# Altium PCB CSI2-WAND_Rev01.PcbDoc
Units mm, origin at the board's own origin, x right, y up, seen from the top; angles counter-clockwise.
Board outline 40.5 x 52 mm, 4 copper layers (Layer1 Top, Layer2, Layer3, Layer4 Bottom), stack 0.95 mm thick; 31 components, 28 nets, 124 pads, 39 vias.
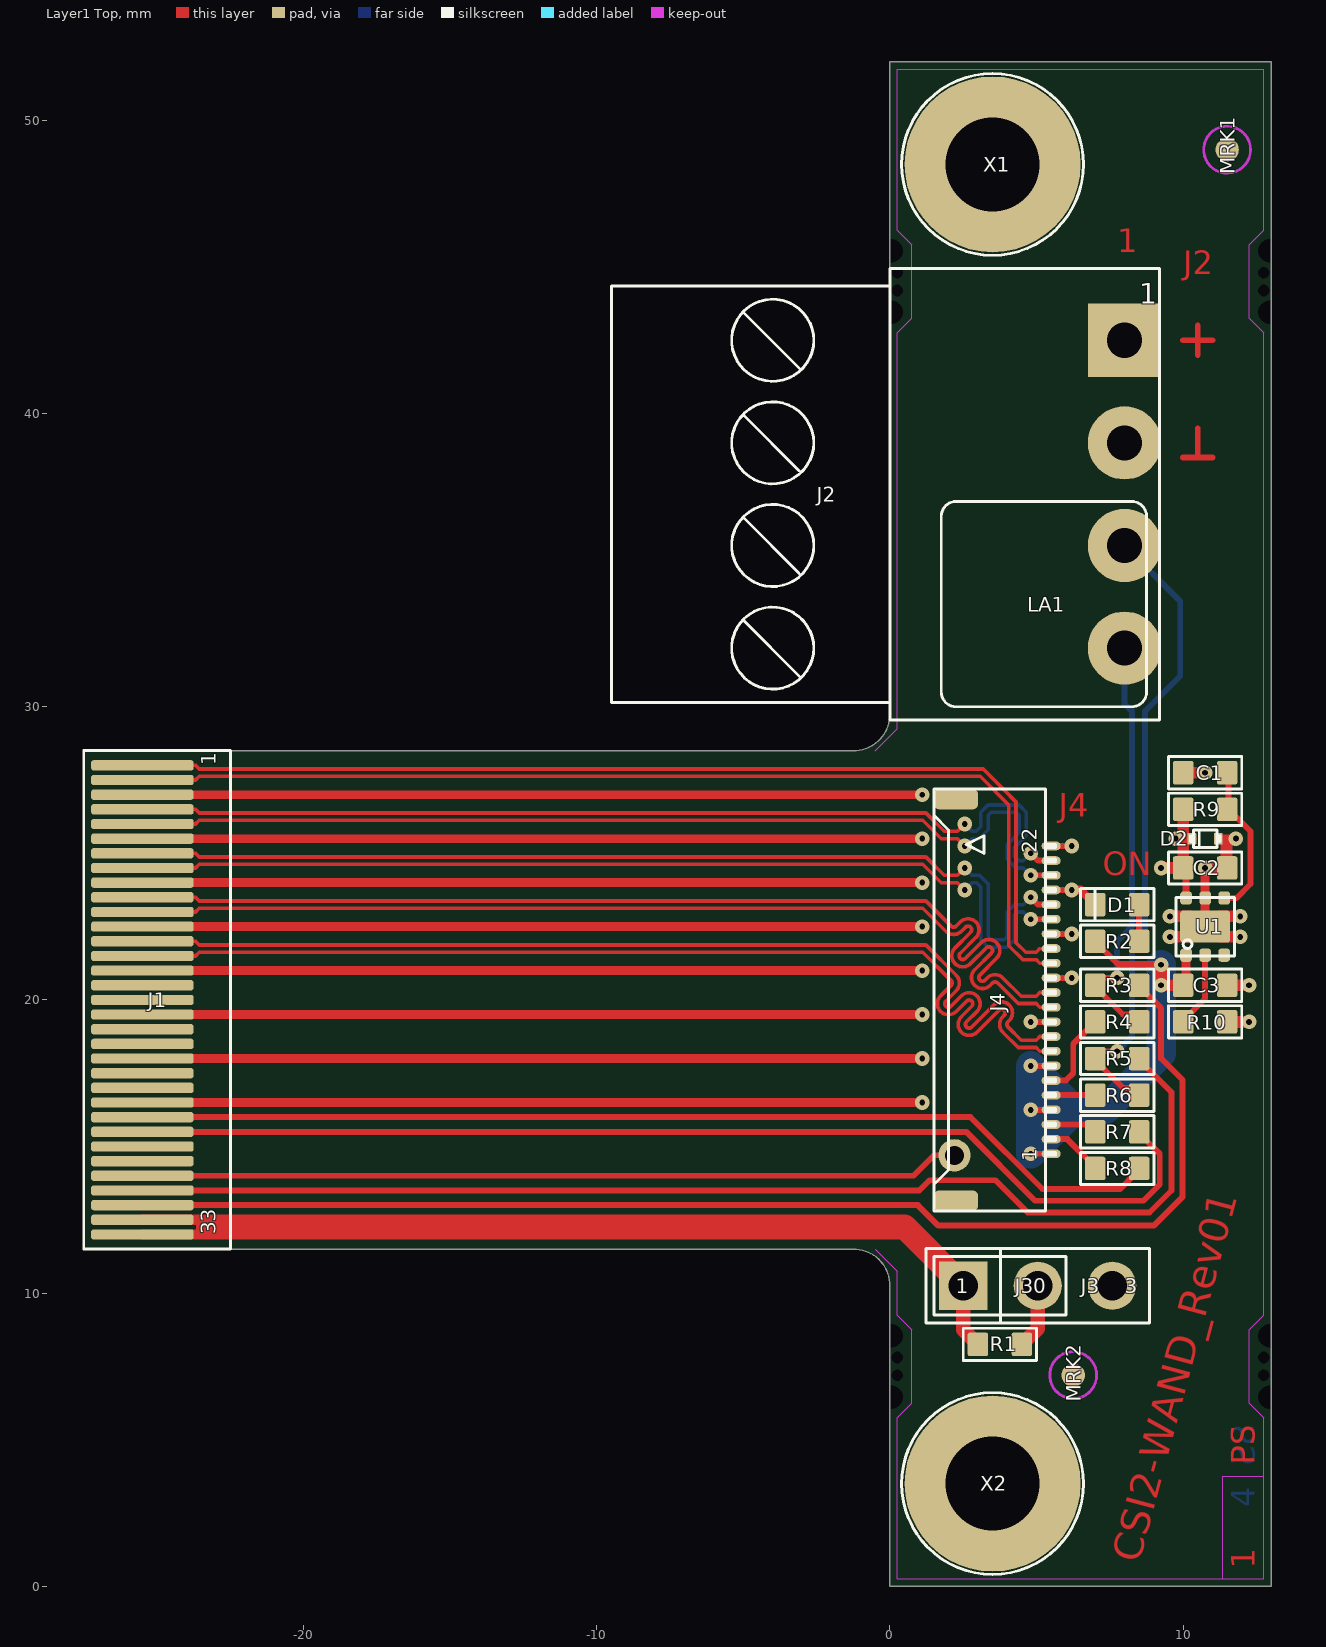
[diagram p0: Layer1 Top view]
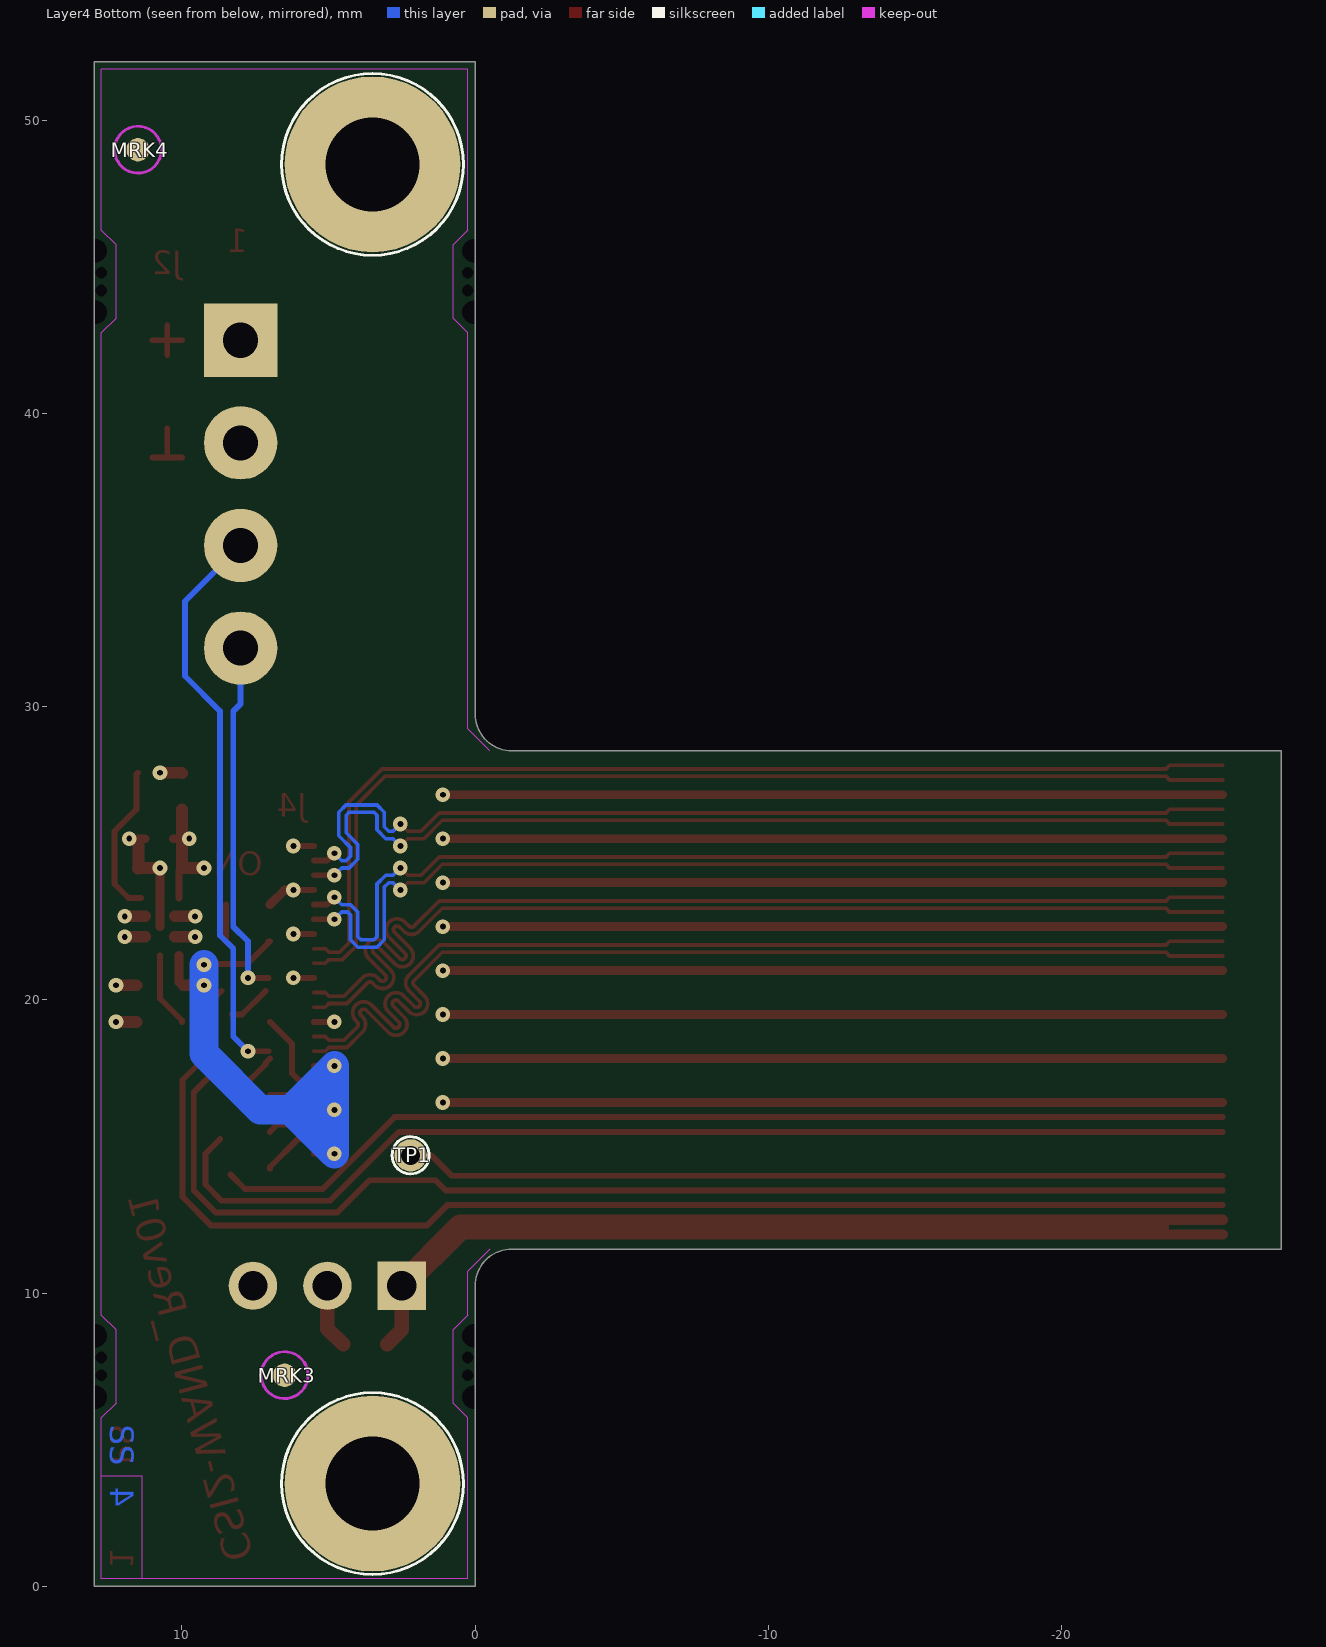
[diagram p1: Layer4 Bottom view, seen from below]
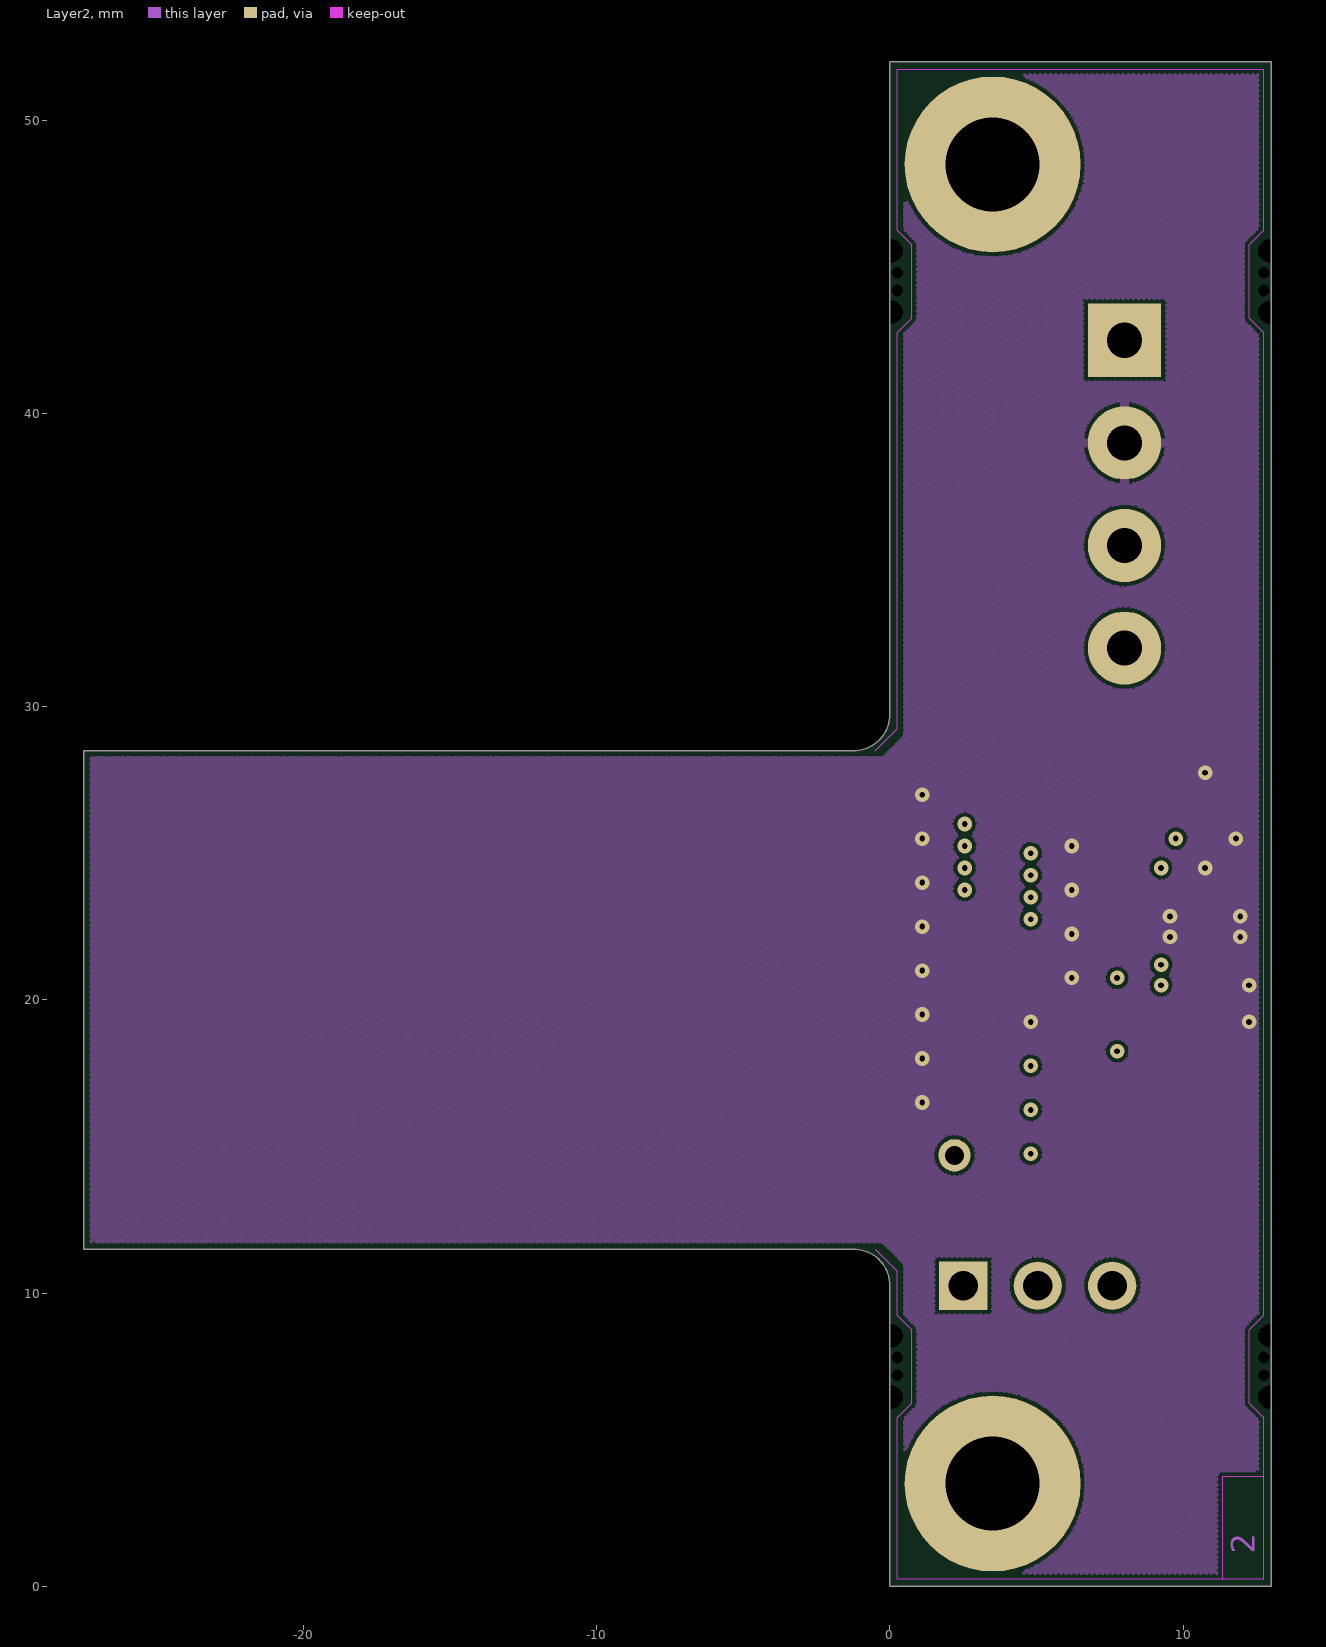
[diagram p2: Layer2]
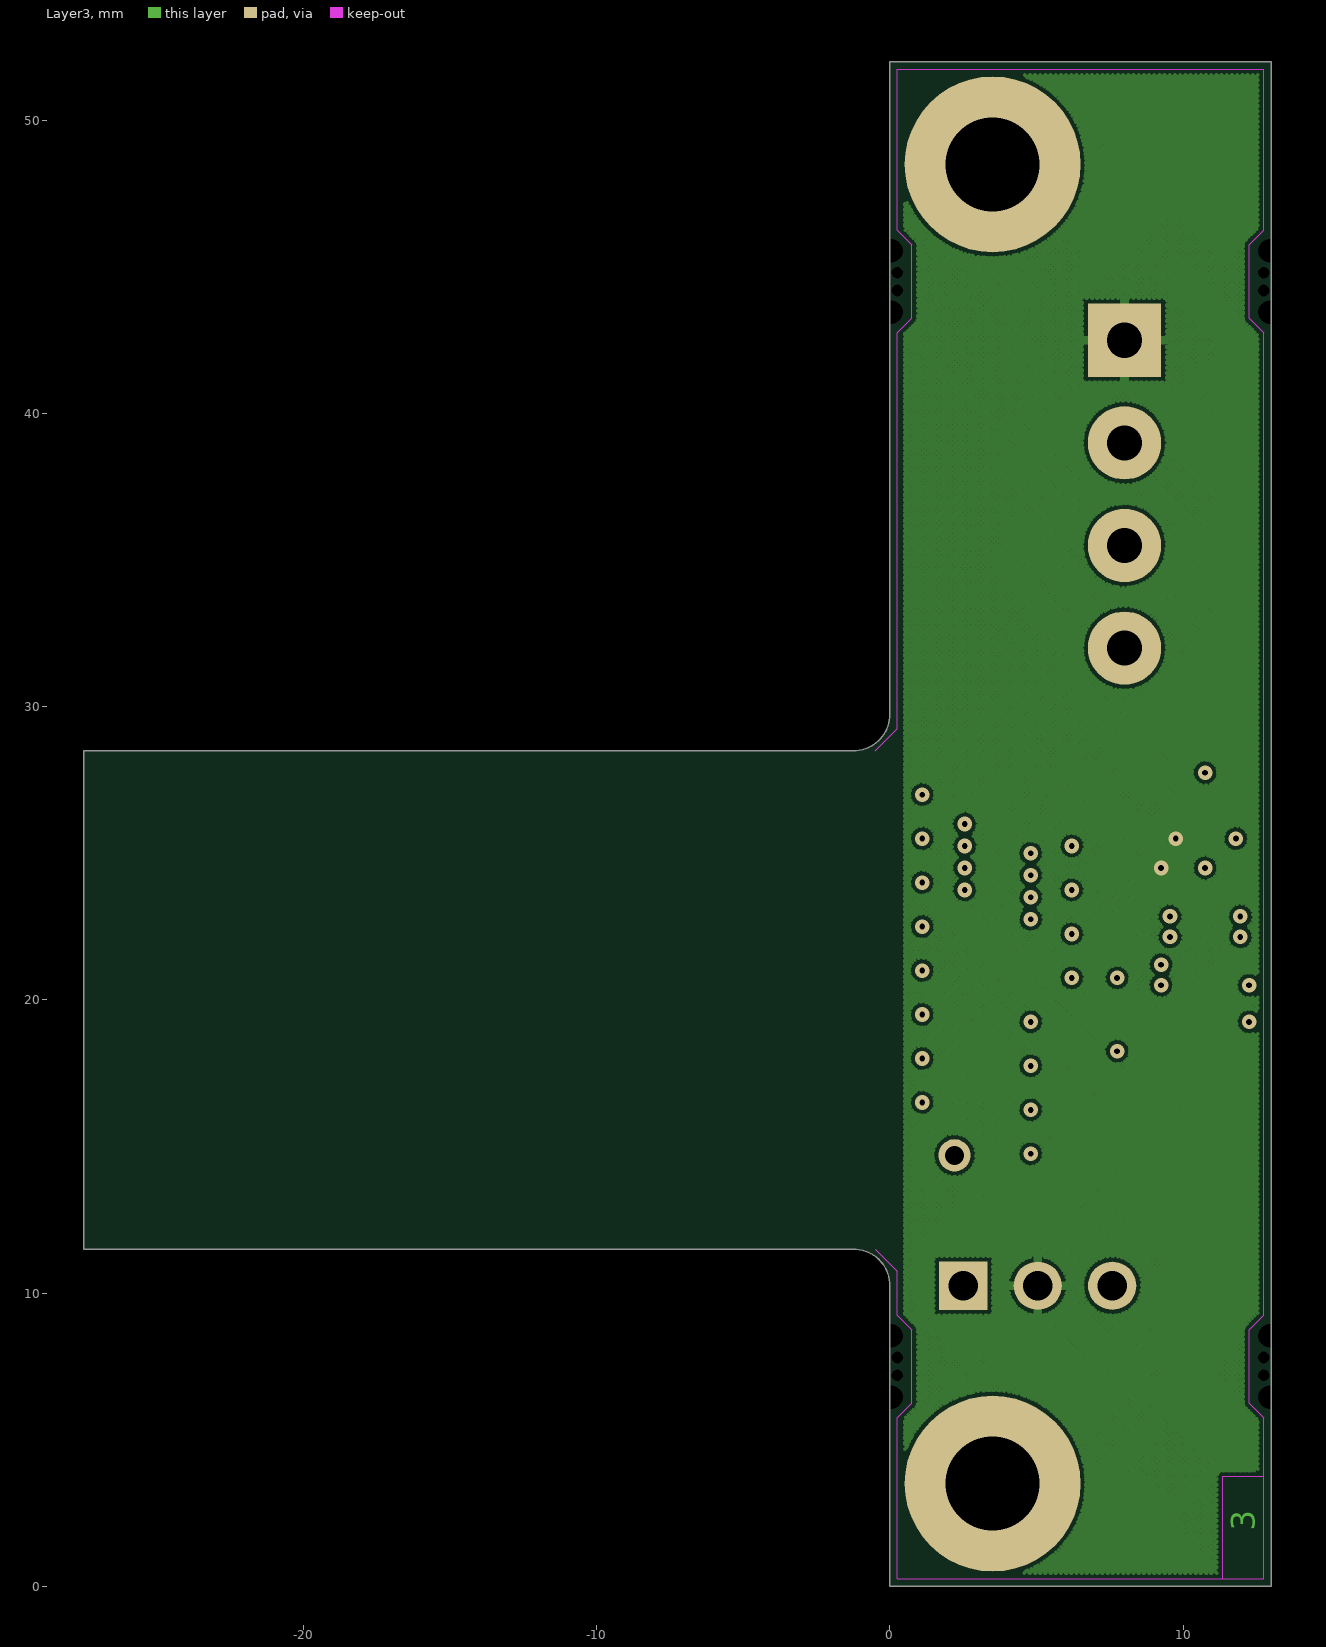
[diagram p3: Layer3]

## Layer stack, top to bottom
Top Solder: solder mask 0.025, Solder Resist, Dk 3.5
Layer1 Top: signal copper 0.035
Dielectric1: prepreg 0.1, FR-4, Dk 4.2
Layer2: signal copper 0.035
Dielectric2: core 0.61, FR-4, Dk 4.2
Layer3: signal copper 0.035
Dielectric3: prepreg 0.1, FR-4, Dk 4.2
Layer4 Bottom: signal copper 0.035
Bottom Solder: solder mask 0.025, Solder Resist, Dk 3.5

## Board outline
-27.5,11.5 -1.25,11.5 cw(c-1.25,10.25) 0,10.25 0,0 13,0 13,52 0,52 0,29.75 cw(c-1.25,29.75) -1.25,28.5 -27.5,28.5

## Design rules (kind name [scope] priority, off if disabled: settings)
Clearance [All] p1: gap=0.125 ignorepadtopadclearanceinfootprint=FALSE except(0: Arc-Hole Track-Hole SMDPad-Hole THPad-Hole Via-Hole Fill-Hole Poly-Hole Region-Hole Text-Hole)
ComponentClearance [All] p1 off: gap=0.254 collisioncheckmode=3 verticalgap=0.254 showdistances=FALSE
DiffPairsRouting [All] p1: maxlimit=1 minlimit=0.125 mostfreqgap=0.125 toplayer_minwidth=0.125 toplayer_maxwidth=0.25 toplayer_prefwidth=0.125 midlayer1_minwidth=0.125 midlayer1_maxwidth=0.25 midlayer1_prefwidth=0.125 midlayer2_minwidth=0.125 midlayer2_maxwidth=0.25 midlayer2_prefwidth=0.125 bottomlayer_minwidth=0.125 bottomlayer_maxwidth=0.25 bottomlayer_prefwidth=0.125 maxuncoupledlength=12.7
FabricationTestPointUsage TestPointUsage [All] p1: valid=0 allowmultiple=FALSE
FabricationTestpoint Testpoint [All] p1: side=3 testpointundercomponent=TRUE minsize=1.016 maxsize=2.54 preferedsize=1.524 minholesize=0 maxholesize=1.016 preferedholesize=0.813 testpointgrid=0.025 allowsidetop=TRUE allowsidebottom=TRUE usegrid=TRUE gridtolerance=0
Height [All] p1 off: minheight=0 maxheight=25.4 prefheight=12.7
HoleSize [All] p1: absolutevalues=TRUE maxlimit=5 minlimit=0.025 maxpercent=80.000 minpercent=20.000
PlaneClearance [All] p1: clearance=0.3
PlaneConnect FreePads [(InPadClass('Free-Pads'))   or (isvia)] p1: planeconnectstyle=Direct reliefexpansion=0.508 reliefentries=4 reliefconductorwidth=0.254 reliefairgap=0.254
PlaneConnect [All] p2: planeconnectstyle=Relief reliefexpansion=0.2 reliefentries=4 reliefconductorwidth=0.2 reliefairgap=0.2
PolygonConnect VIA [isvia] p1: connectstyle=Direct reliefconductorwidth=0.2 reliefentries=4 polygonreliefangle="90 Angle" airgapwidth=0.254
PolygonConnect PolygonConnect_1 [All] p2: connectstyle=Relief reliefconductorwidth=0.3 reliefentries=4 polygonreliefangle="90 Angle" airgapwidth=0.125
RoutingVias [All] p1: holewidth=0.2 width=0.5 viastyle="Through Hole" minholewidth=0.2 minwidth=0.5 maxholewidth=0.2 maxwidth=0.5
SilkToSolderMaskClearance SilkscreenOverComponentPads [IsPad] p1: minsilkscreentomaskgap=0.254 clearancetoexposedcopper=TRUE
SolderMaskExpansion SolderMaskExpansion_VIA [(IsVia)] p1: expansion=-9
SolderMaskExpansion [All] p2: expansion=0.05
Width [All] p1: maxlimit=2 minlimit=0.1 preferedwidth=0.15
21 further rules are at their usual default settings.

## Classes and differential pairs
differential pair B7-CSI2-TXC: +B7-CSI2-TXC_P -B7-CSI2-TXC_N
differential pair B7-CSI2-TXD0: +B7-CSI2-TXD0_P -B7-CSI2-TXD0_N
differential pair B7-CSI2-TXD1: +B7-CSI2-TXD1_P -B7-CSI2-TXD1_N
differential pair B7-CSI2-TXD2: +B7-CSI2-TXD2_P -B7-CSI2-TXD2_N
differential pair B7-CSI2-TXD3: +B7-CSI2-TXD3_P -B7-CSI2-TXD3_N

## Components (designator, comment, footprint, x,y, rotation, side; value= is the part's Value field where it differs from the comment)
C1 "100n" C-0603_1.0 10.75,27.75 r180 top
C2 "10u" C-0603_1.0 10.75,24.5 r0 top
C3 "10u" C-0603_1.0 10.75,20.5 r0 top
D1 "GREEN" D-0603-LED 7.75,23.25 r0 top
D2 "ESD9B5.0ST5G" D-SOD923 10.75,25.5 r180 top
J1 "CON FPC33" "CON33_FLEX_FPC3.5_5- Inverted Pins" -25.5,20 r90 top
J2 "MC 1,5/4-G-3,5" "CON_MiniCon 4pol 3mm5" 8,42.5 r270 top locked
J3 "CON1x3" "CON 1x3 RM2.54" 2.5,10.25 r0 top
J4 "CON FFC22_Inverted" "J-FH55-22S-0.5SH - Inverted Pins" 5.5,20 r270 top locked
J30 "Jumper" J-JUMPER-2.54 3.75,10.25 r180 top
LA1 "LABEL 7x7mm" "PCB LABEL 7x7" 5.25,33.5 r0 top
MRK1 "Marker Single Layer" PCB_MARKER_PAD_TOP 11.5,49 r90 top
MRK2 "Marker Single Layer" PCB_MARKER_PAD_TOP 6.25,7.2 r0 top
MRK3 "Marker Single Layer" PCB_MARKER_PAD_TOP 6.5,7.2 r180 bottom
MRK4 "Marker Single Layer" PCB_MARKER_PAD_TOP 11.5,49 r180 bottom
R1 "NL" R-0603_0.6 3.75,8.25 r0 top
R2 "3k3" R-0603_0.6 7.75,22 r0 top
R3 "0R0" R-0603_0.6 7.75,20.5 r0 top
R4 "0R0" R-0603_0.6 7.75,19.25 r180 top
R5 "0R0" R-0603_0.6 7.75,18 r0 top
R6 "0R0" R-0603_0.6 7.75,16.75 r180 top
R7 "0R0" R-0603_0.6 7.75,15.5 r180 top
R8 "0R0" R-0603_0.6 7.75,14.25 r180 top
R9 "11k" R-0603_0.6 10.75,26.5 r0 top
R10 "11k" R-0603_0.6 10.75,19.25 r180 top
T1 "PCB Text TOP" "PCB TEXTFIELD TOP 2" -50.25,-13.75 r0 top locked
T2 "PCB Text BOT" "PCB TEXTFIELD BOT 2" -50.25,-13.75 r180 bottom locked
TP1 "TP" TP_11_065 2.2,14.7 r180 bottom
U1 "NCP380HMUAJAATBG" IC-DFN06_2.0x2.0x0.8 10.75,22.5 r0 top
X1 "Hole" HOLE-3.2-6.0-DK 3.5,48.5 r0 top
X2 "Hole" HOLE-3.2-6.0-DK 3.5,3.5 r0 top

## Footprints (in the part's own frame and the unit in brackets; to place one, negate y for a bottom-side part, rotate by r counter-clockwise, add the part's x,y. Pads: shape width x height; smd on the part's side, far side on the other; paste and mask are expansions set on the pad)
C-0603_1.0 [mm]
  rrect20% 0.7x0.8 smd: 1(-0.75,0) 2(0.75,0)
  silkscreen extent -1.25,-0.55 1.25,0.55, body extent -0.9,-0.5 0.9,0.5, height 0.99
"CON33_FLEX_FPC3.5_5- Inverted Pins" [mm]
  rrect50% 0.35x3.5 smd paste-9: 1(8,0) 2(7.5,0) 3(7,0) 4(6.5,0) 5(6,0) 6(5.5,0) 7(5,0) 8(4.5,0) 9(4,0) 10(3.5,0) 11(3,0) 12(2.5,0) 13(2,0) 14(1.5,0) 15(1,0) 16(0.5,0) 17(0,0) 18(-0.5,0) 19(-1,0) 20(-1.5,0) 21(-2,0) 22(-2.5,0) 23(-3,0) 24(-3.5,0) 25(-4,0) 26(-4.5,0) 27(-5,0) 28(-5.5,0) 29(-6,0) 30(-6.5,0) 31(-7,0) 32(-7.5,0) 33(-8,0)
  silkscreen extent -8.5,-3 8.5,2
"CON 1x3 RM2.54" [mm]
  rect 1.65x1.65 hole 1: 1(0,0)
  round 1.65 hole 1: 2(2.54,0) 3(5.08,0)
  silkscreen extent -1.27,-1.27 6.35,1.27
"CON_MiniCon 4pol 3mm5" [mm]
  rect 2.5x2.5 hole 1.2: 1(0,0)
  round 2.5 hole 1.2: 2(3.5,0) 3(7,0) 4(10.5,0)
  silkscreen extent -2.45,-17.5 12.95,1.2, body extent -2.45,-8 12.95,1.2, height 7.25
D-0603-LED [mm] "Osram Chip LED 0603"
  rrect20% 0.7x0.8 smd: A(0.75,0) K(-0.75,0)
  silkscreen extent -1.25,-0.55 1.25,0.55, body extent -0.82,-0.36 0.83,0.36, height 0.67
D-SOD923 [mm]
  rrect20% 0.3x0.4 smd: A(-0.45,0) K(0.45,0)
  silkscreen extent -0.5,-0.3 0.5,0.3, body extent -0.4,-0.3 0.4,0.3, height 0.4
HOLE-3.2-6.0-DK [mm]
  round 6 hole 3.2: 1(0,0)
  silkscreen extent -3.1,-3.1 3.1,3.1
IC-DFN06_2.0x2.0x0.8 [mm]
  rrect50% 0.4x0.45 smd paste-0.02: 1(-0.65,-0.975) 2(0,-0.975) 3(0.65,-0.975) 4(0.65,0.975) 5(0,0.975) 6(-0.65,0.975)
  rrect20% 1.7x1.1 smd paste-9: 7(0,0)
  silkscreen extent -1,-1 1,1, body extent -1,-1 1,1, height 0.85
"J-FH55-22S-0.5SH - Inverted Pins" [mm]
  oval 0.3x0.65 smd: 1(5.25,0) 2(4.75,0) 3(4.25,0) 4(3.75,0) 5(3.25,0) 6(2.75,0) 7(2.25,0) 8(1.75,0) 9(1.25,0) 10(0.75,0) 11(0.25,0) 12(-0.25,0) 13(-0.75,0) 14(-1.25,0) 15(-1.75,0) 16(-2.25,0) 17(-2.75,0) 18(-3.25,0) 19(-3.75,0) 20(-4.25,0) 21(-4.75,0) 22(-5.25,0)
  rrect50% 0.7x1.5 smd: 23(-6.85,-3.25) 24(6.85,-3.25)
  silkscreen extent -7.2,-4 7.2,0.15, body extent -7.2,-4.05 7.2,0.2, height 1.46
J-JUMPER-2.54 [mm]
  silkscreen extent -2.25,-1 2.25,1, body extent -2.5,-1.25 2.5,1.25, height 9.5
"PCB LABEL 7x7" [mm]
  silkscreen extent -3.5,-3.5 3.5,3.5, body extent -3.5,-3.5 3.5,3.5, height 0.1
"PCB TEXTFIELD BOT 2" [mm]
"PCB TEXTFIELD TOP 2" [mm]
PCB_MARKER_PAD_TOP [mm] "PCB Marker with Pad for X-/Y-Coordinates (Single Layer)"
  round 0.8 smd paste-999 mask+0.4: 1(0,0)
  Layer1 Top keep-out circle w0.1: c0,0 r0.8
R-0603_0.6 [mm]
  rrect20% 0.7x0.8 smd: 1(-0.75,0) 2(0.75,0)
  silkscreen extent -1.25,-0.55 1.25,0.55, body extent -0.85,-0.45 0.85,0.45, height 0.59
TP_11_065 [mm] "Testpoint: Pad=1,1mm; Hole=0,65mm"
  round 1.1 hole 0.65: 1(0,0)
  silkscreen extent -0.64,-0.63 0.63,0.63

## Part data
C1: library part "C 100N 50V X7R 0603", "Capacitor Ceramic SMD/0603/50V/X7R/10%", Dielectric=X7R, KHK Part Number=K8340023, Manufacturer=several, Tolerance=10%, Voltage=50V, Manufacturer Part Number=several
C2 C3: library part "C 10U 10V X7T 0603 125°C", "Capacitor Ceramic SMD/0603/10V/X7T/20%/125°C", Dielectric=X7T, KHK Part Number=10509, Manufacturer=several, Tolerance=20%, Voltage=10V, Manufacturer Part Number=several
D1: library part "D LED 0603 green", "Chip LED green 430mcd", Color=green, Current=20mA, KHK Part Number=8172, Manufacturer=Würth, Manufacturer Part Number=150060GS75000
D2: library part "D ESD9B5.0ST5G", "DIODE TVS; 400W; 5.8-7.8V; BIDIRECT", KHK Part Number=7250, Manufacturer="ON Semiconductor", Manufacturer Part Number=ESD9B5.0ST5G
J1: library part "CON FPC33_FLEXPCB", "FPC Connector 0.5mm FLEX PCB"
J2: library part "CON MiniCon 4pol 3mm5", "Phoenix MC 1,5/4-G-3,5 MiniCon 4polig 3,5mm", KHK Part Number=12637, Manufacturer=Phoenix, Manufacturer Part Number="MC 1,5/4-G-3,5"
J3: library part "CON 1x3 2.54", "Stiftleiste; 1x3; 2.54mm; gerade", KHK Part Number=K7600610, Manufacturer="fischer elektronik", Manufacturer Part Number="SL 11 124 3 G"
J4: library part "CON FFC22_FH55-22S-0.5SH_Inverted", "FFC Connector 0.5mm shielded", KHK Part Number=10357, Manufacturer=Hirose, Manufacturer Part Number=FH55-22S-0.5SH
J30: library part "CON Jumper 2.54mm", "CON/JUMPER/STC02SYAN; 2-pin; 2.54mm; 3A; FEMALE; VERTICAL; BLACK", KHK Part Number=13444, Manufacturer=several, Manufacturer Part Number=several
LA1: library part "PCB LABEL 7x7", Manufacturer=several, Manufacturer Part Number=several
MRK1 MRK2 MRK3 MRK4: library part "PCB Marker Pad Single Layer", "Position Marker for PCBs"
R1: library part "R X 0603", "Standard Resistor SMD/0603/1%/100mW/TK100", Temperature Coefficient=TK100, Tolerance=1%
R2: library part "R 3K3 1% 0603", "Standard Resistor SMD/0603/1%/100mW/TK100", KHK Part Number=K8250070, Manufacturer=several, Tolerance=1%, Manufacturer Part Number=several
R3 R4 R5 R6 R7 R8: library part "R 0R0 1% 0603", "Standard Resistor SMD/0603/1%/100mW/TK100", KHK Part Number=K8250041, Manufacturer=several, Tolerance=1%, Manufacturer Part Number=several
R9 R10: library part "R 11K 1% 0603", "Standard Resistor SMD/0603/1%/100mW/TK100", KHK Part Number=K8250147, Manufacturer=several, Temperature Coefficient=TK100, Tolerance=1%, Manufacturer Part Number=several
T1: library part "PCB TEXT FIELD TOP", "PCB Textfield TOP"
T2: library part "PCB TEXT FIELD BOT", "PCB Textfield BOT"
TP1: library part TP_11_065, "Testpoint: Pad=1,1mm; Hole=0,65mm"
U1: library part "IC  NCP380HMUAJAATBG", "IC/PWR/LOADSW;1V2-5V5;3A;0R03/WLCSP6/1x1.5x0.63mm", KHK Part Number=13676, Manufacturer=onsemi, I max=2.1A, Manufacturer Part Number=NCP380HMUAJAATBG, Vin=2.5V-5.5V
X1 X2: library part "PCB HOLE M3-6-DK", "HOLE M3"

## Free pads (board coordinates)
  round 0 hole 0.8 unplated mask+0.5: 0(0.05,6.45) 0(0.05,8.55) 0(0.05,43.45) 0(0.05,45.55) 0(12.95,6.45) 0(12.95,8.55) 0(12.95,43.45) 0(12.95,45.55)
  round 0 hole 0.4 unplated mask+0.3: 0(0.25,7.2) 0(0.25,7.8) 0(0.25,44.2) 0(0.25,44.8) 0(12.75,7.2) 0(12.75,7.8) 0(12.75,44.2) 0(12.75,44.8)

## Via types
v1: diameter 0.5, hole 0.2, Layer1 Top to Layer4 Bottom, 39 vias

## Nets (pads, with @x,y where several pads share a name; then routed paths per layer and width w, separated by ;. In a path a pad name is that pad's centre, name@x,y a point inside that pad or via, vN(x,y) a via of type N, cw(c..) or ccw(c..) an arc to the next point about the centre after c; other vN are vias at no path point)
B7-CSI2-TXC_N: J1.2 J4.14 | length 36.5
  Layer1 Top w0.125: J1.2 -23.688,27.5 -23.563,27.625 3.075,27.625 4.05,26.65 4.05,21.85 4.525,21.375 4.988,21.375 5.113,21.25 J4.14
B7-CSI2-TXC_P: J1.1 J4.15 | length 36.5
  Layer1 Top w0.125: J1.1 -23.688,28 -23.563,27.875 3.179,27.875 3.877,27.177 4.3,26.754 4.3,21.954 4.629,21.625 4.988,21.625 5.113,21.75 J4.15
B7-CSI2-TXD0_N: J1.5 J4.20 | length 34.5
  Layer1 Top w0.125: J1.5 -23.688,26 -23.563,26.125 1.121,26.125 1.746,25.5 2.3,25.5 v1(2.55,25.25)
  Layer1 Top w0.2: v1(4.8,24.25) J4.20
  Layer4 Bottom w0.125: v1(2.55,25.25) 2.8,25.5 3.05,25.5 3.35,25.8 3.35,26.3 3.45,26.4 4.3,26.4 4.4,26.3 4.4,25.7 4,25.3 4,24.8 4.3,24.5 4.55,24.5 v1(4.8,24.25)
B7-CSI2-TXD0_P: J1.4 J4.21 | length 34.6
  Layer1 Top w0.125: J1.4 -23.688,26.5 -23.563,26.375 1.225,26.375 1.85,25.75 2.3,25.75 v1(2.55,26)
  Layer1 Top w0.2: v1(4.8,25) 5.05,24.75 J4.21
  Layer4 Bottom w0.125: v1(2.55,26) 2.8,25.75 2.946,25.75 3.1,25.904 3.1,26.404 3.346,26.65 4.404,26.65 4.65,26.404 4.65,25.596 4.25,25.196 4.25,24.904 4.404,24.75 4.55,24.75 v1(4.8,25)
B7-CSI2-TXD1_N: J1.8 J4.17 | length 34.6
  Layer1 Top w0.125: J1.8 -23.688,24.5 -23.563,24.625 1.121,24.625 1.746,24 2.3,24 v1(2.55,23.75)
  Layer1 Top w0.2: v1(4.8,22.75) J4.17
  Layer4 Bottom w0.125: v1(2.55,23.75) 2.8,24 2.95,24 3.1,23.85 3.1,22.05 3.35,21.8 4,21.8 4.25,22.05 4.25,22.896 4.354,23 4.55,23 v1(4.8,22.75)
B7-CSI2-TXD1_P: J1.7 J4.18 | length 34.7
  Layer1 Top w0.125: J1.7 -23.688,25 -23.563,24.875 1.225,24.875 1.85,24.25 2.3,24.25 v1(2.55,24.5)
  Layer1 Top w0.2: v1(4.8,23.5) 5.05,23.25 J4.18
  Layer4 Bottom w0.125: v1(2.55,24.5) 2.8,24.25 3.054,24.25 3.35,23.954 3.35,22.154 3.454,22.05 3.896,22.05 4,22.154 4,23 4.25,23.25 4.55,23.25 v1(4.8,23.5)
B7-CSI2-TXD2_N: J1.11 J4.11 | length 36.5
  Layer1 Top w0.125: J1.11 -23.688,23 -23.563,23.125 1.121,23.125 1.905,22.341 ccw(c2.171,22.606) 2.436,22.341 2.576,22.481 cw(c2.664,22.393) 2.752,22.481 cw(c2.664,22.393) 2.789,22.393 cw(c2.664,22.393) 2.752,22.304 2.218,21.769 ccw(c2.483,21.504) 2.218,21.239 ccw(c2.483,21.504) 2.748,21.239 3.283,21.774 cw(c3.371,21.685) 3.459,21.774 ; 3.46,21.774 cw(c3.371,21.685) 3.496,21.685 cw(c3.371,21.685) 3.46,21.597 2.89,21.028 ccw(c3.155,20.762) 2.89,20.497 ccw(c3.155,20.762) 3.42,20.497 3.496,20.573 cw(c3.585,20.485) 3.673,20.573 4.371,19.875 4.988,19.875 5.113,19.75 J4.11
B7-CSI2-TXD2_P: J1.10 J4.12 | length 36.5
  Layer1 Top w0.125: J1.10 -23.688,23.5 -23.563,23.375 1.225,23.375 2.082,22.518 ccw(c2.171,22.606) 2.259,22.518 2.399,22.658 cw(c2.664,22.393) 2.929,22.658 cw(c2.664,22.393) 3.039,22.393 cw(c2.664,22.393) 2.929,22.127 2.394,21.592 ccw(c2.483,21.504) 2.394,21.416 ccw(c2.483,21.504) 2.571,21.416 3.106,21.951 cw(c3.371,21.685) 3.636,21.951 cw(c3.371,21.685) 3.746,21.685 cw(c3.371,21.685) 3.636,21.42 3.067,20.851 ; 3.067,20.851 ccw(c3.155,20.762) 3.067,20.674 ccw(c3.155,20.762) 3.244,20.674 3.32,20.75 cw(c3.585,20.485) 3.85,20.75 4.475,20.125 4.988,20.125 5.113,20.25 J4.12
B7-CSI2-TXD3_N: J1.14 J4.8 | length 36.5
  Layer1 Top w0.125: J1.14 -23.688,21.5 -23.563,21.625 1.121,21.625 2.081,20.666 cw(c1.993,20.577) 2.118,20.577 cw(c1.993,20.577) 2.081,20.489 1.727,20.135 ccw(c1.993,19.87) 1.727,19.605 ccw(c1.993,19.87) 2.258,19.605 2.611,19.958 cw(c2.7,19.87) 2.788,19.958 cw(c2.7,19.87) 2.825,19.87 cw(c2.7,19.87) 2.788,19.782 2.434,19.428 ccw(c2.7,19.163) 2.434,18.898 ccw(c2.7,19.163) 2.965,18.898 3.715,19.648 cw(c3.803,19.559) 3.892,19.648 cw(c3.803,19.559) 3.928,19.559 cw(c3.803,19.559) 3.892,19.471 3.849,19.428 ccw(c4.114,19.163) 3.849,18.898 4.371,18.375 4.988,18.375 5.113,18.25 J4.8
B7-CSI2-TXD3_P: J1.13 J4.9 | length 36.5
  Layer1 Top w0.125: J1.13 -23.688,22 -23.563,21.875 1.225,21.875 2.258,20.842 ; 2.258,20.842 cw(c1.993,20.577) 2.368,20.577 cw(c1.993,20.577) 2.258,20.312 1.904,19.958 ccw(c1.993,19.87) 1.904,19.782 ccw(c1.993,19.87) 2.081,19.782 2.434,20.135 cw(c2.7,19.87) 2.965,20.135 cw(c2.7,19.87) 3.075,19.87 cw(c2.7,19.87) 2.965,19.605 2.611,19.251 ; 2.611,19.251 ccw(c2.7,19.163) 2.611,19.075 ccw(c2.7,19.163) 2.788,19.075 3.538,19.825 cw(c3.803,19.559) 4.068,19.825 cw(c3.803,19.559) 4.178,19.559 cw(c3.803,19.559) 4.068,19.294 4.026,19.251 ; 4.025,19.075 cw(c4.114,19.163) 4.025,19.251 ; 4.025,19.075 4.475,18.625 4.988,18.625 5.113,18.75 J4.9
EXT-GPIO0-I2C-SCL: J4.2 R8.2 | length 1.9
  Layer1 Top w0.2: J4.2 6.05,15.25 7,14.3 R8.2
EXT-GPIO1-I2C-SDA: J4.3 R7.2 | length 1.6
  Layer1 Top w0.2: J4.3 6.75,15.75 R7.2
EXT-GPIO2: J4.5 R6.2 | length 1.5
  Layer1 Top w0.2: J4.5 R6.2
EXT-GPIO3: J4.6 R4.2 | length 2.9
  Layer1 Top w0.2: J4.6 6,17.25 6.25,17.5 6.25,18.5 R4.2
GND: C1.2 C2.2 C3.2 D1.K D2.A J1.3 J1.6 J1.9 J1.12 J1.15 J1.18 J1.21 J1.24 J2.2 J4.10 J4.13 J4.16 J4.19 J4.22 R10.1 U1.5 U1.7 | length 226.4
  Layer1 Top w0.2: v1(4.8,19.25) J4.10 ; J4.13 v1(6.2,20.75) ; J4.16 v1(6.2,22.25) ; J4.19 v1(6.2,23.75) ; J4.22 v1(6.2,25.25)
  Layer1 Top w0.3: J1.24 v1(1.1,16.5) ; J1.21 v1(1.1,18) ; J1.18 v1(1.1,19.5) ; J1.15 v1(1.1,21) ; J1.12 v1(1.1,22.5) ; J1.9 v1(1.1,24) ; J1.6 v1(1.1,25.5) ; J1.3 v1(1.1,27) ; v1(6.2,23.75) 6.5,23.75 D1.K ; U1.7 U1.5 v1(10.75,24.5) ; D2.A@11.25,25.5 v1(11.8,25.5)
  Layer1 Top w0.4: v1(9.55,22.15) U1.7@10.25,22.15 ; v1(9.55,22.85) U1.7@10.25,22.85 ; C1.2@10,27.731 C1.2@10.019,27.75 ; C1.2@10.05,27.75 v1(10.75,27.75) ; v1(10.75,24.5) C2.2@11.45,24.5 ; U1.7@11.25,22.15 v1(11.95,22.15) ; U1.7@11.25,22.85 v1(11.95,22.85) ; 11.481,25.35 11.481,24.5 C2.2@11.5,24.481 ; R10.1@11.55,19.25 v1(12.25,19.25) ; C3.2@11.55,20.5 v1(12.25,20.5)
GPIO4_14: J1.31 R3.2 | length 43.8
  Layer1 Top w0.2: J1.31 0.95,13 1.65,12.3 9,12.3 9.984,13.284 9.984,17.266 9.25,18 9.25,19.712 R3.2@8.65,20.312
GPIO6: J1.30 R5.2 | length 40.6
  Layer1 Top w0.2: J1.30 1,13.5 1.35,13.85 3.6,13.85 4.7,12.75 8.85,12.75 9.6,13.5 9.6,16.85 R5.2@8.7,17.75
GPIO_3_CLK02: J1.29 TP1.1 | length 28
  Layer1 Top w0.2: J1.29 0.8,14 1.5,14.7 TP1.1
I2C2_SCL: J1.25 R8.1 | length 35.1
  Layer1 Top w0.2: J1.25 2.75,16 5.2,13.55 7.85,13.55 R8.1@8.35,14.05
I2C2_SDA: J1.26 R7.1 | length 37.7
  Layer1 Top w0.2: J1.26 2.6,15.5 4.95,13.15 8.65,13.15 9.2,13.7 9.2,14.75 R7.1@8.7,15.25
NetC1_1: C1.1 R9.2 U1.4 | length 5.2
  Layer1 Top w0.2: U1.4 11.825,23.475 12.3,23.95 12.3,25.75 11.55,26.5 11.55,27.7 C1.1
NetC3_1: C3.1 J4.1 J4.4 J4.7 R2.1 U1.1 | length 22.4
  Layer1 Top w0.2: v1(4.8,14.75) J4.1 ; v1(4.8,16.25) J4.4 ; v1(4.8,17.75) J4.7 ; R2.1@7.05,22 R2.1 6.995,22 7.768,21.227 v1@9.041,21.227
  Layer1 Top w0.3: C3.1@10.1,20.6 U1.1
  Layer1 Top w0.4: v1(9.25,21.2) v1(9.25,20.5) C3.1@9.95,20.5
  Layer4 Bottom w1: v1(9.25,21.2) v1(9.25,20.5) 9.25,18.17 7.33,16.25 6.3,16.25 ; v1(4.8,16.25) 6.3,16.25 ; v1(4.8,16.25) v1(4.8,17.75) 6.3,16.25 ; v1(4.8,16.25) v1(4.8,14.75) 6.3,16.25
NetD1_A: D1.A R2.2 | length 1.3
  Layer1 Top w0.2: R2.2 D1.A
NetJ2_3: J2.3 R5.1 R6.1 | length 21.4
  Layer1 Top w0.2: R5.1 7.15,17.85 7.15,17.8 7.95,17 R6.1@8.3,17 ; R5.1@7.05,18.25 v1(7.75,18.25)
  Layer4 Bottom w0.2: v1(7.75,18.25) 8.25,18.75 8.25,21.75 8.7,22.2 8.7,29.85 9.9,31.05 9.9,33.6 J2.3
NetJ2_4: J2.4 R3.1 R4.1 | length 13.7
  Layer1 Top w0.2: R3.1@7.05,20.75 v1(7.75,20.75) ; R3.1@7.15,20.3 7.95,19.5 R4.1@8.3,19.5
  Layer4 Bottom w0.2: v1(7.75,20.75) 7.75,22 8.25,22.5 8.25,29.85 8,30.1 J2.4
NetR10_2: R10.2 U1.2 | length 2.6
  Layer1 Top w0.2: R10.2 10,19.3 10.75,20.05 U1.2
VCC5V0: J1.32 J1.33 J3.1 R1.1 | length 33.8
  Layer1 Top w0.35: J1.33 -23.35,12 ; J1.32 -23.35,12.5
  Layer1 Top w0.5: R1.1 2.5,8.75 J3.1 J3.1@3,9.75
  Layer1 Top w0.85: -23.25,12.25 0.5,12.25 J3.1
VCC-EXT-IN: C2.1 D2.K J2.1 J3.2 R1.2 R9.1 U1.6 | length 6.2
  Layer1 Top w0.25: U1.6 C2.1@10.1,24.4
  Layer1 Top w0.3: v1(9.75,25.5) D2.K
  Layer1 Top w0.4: v1(9.25,24.5) C2.1@9.95,24.5 ; C2.1 10,25.35 ; 10,25.55 R9.1
  Layer1 Top w0.5: R1.2 5.04,8.79 J3.2
pads on no net: J1.16 J1.17 J1.19 J1.20 J1.22 J1.23 J1.27 J1.28 J3.3 J4.23 J4.24 MRK1.1 MRK2.1 MRK3.1 MRK4.1 U1.3 X1.1 X2.1
copper on no net: | length 4
  Layer1 Top w0.2: 10,38.5 11,38.5 ; 10,42.5 11,42.5 ; 10.5,38.5 10.5,39.5 ; 10.5,42 10.5,43

## Polygon pours and split planes (outlines as drawn)
VCC-EXT-IN on Layer3 "VCC-EXT-IN_L03_P000" (hatched 45Degree grid 0.125 track 0.125, remove dead copper, pour order 0): 0.5,0 0.5,52 13,52 13,0
GND on Layer2 "GND_L02_P006" (hatched 45Degree grid 0.125 track 0.125, remove dead copper, pour order 6): -27.25,28.25 -0.25,28.25 0.5,29 0.5,52 13,52 13,0 0.5,0 0.5,11 -0.25,11.75 -27.25,11.75

## Keep-outs
Keep-Out Layer:
  lines w0.024: 11.35,0.25 11.35,3.75 12.75,3.75
  lines w0.025: -0.5,11.5 0.25,10.75 0.25,9.25 0.75,8.75 0.75,6.25 0.25,5.75 0.25,0.25 12.75,0.25 12.75,5.75 12.25,6.25 12.25,8.75 12.75,9.25 12.75,42.75 12.25,43.25 12.25,45.75 12.75,46.25 12.75,51.75 0.25,51.75 0.25,46.25 0.75,45.75 0.75,43.25 0.25,42.75 0.25,29.25 -0.5,28.5

## Other copper
Layer1 Top:
  text "1" at 7.75,45.5 h0.8
  text "J2" at 10,44.75 h0.8
  text "J4" at 5.75,26.25 h0.8
  text "ON" at 7.25,24.25 h0.8
  text "PS" at 12.45,4.15 h0.8 r90
  text "CSI2-WAND_Rev01" at 8.5,0.75 h1 r75
  text "1" at 12.45,0.6 h0.8 r90
Layer2:
  text "2" at 12.45,1.1 h0.8 r90
  text "Layer 2" at -17.25,-21.75 h0.9
Layer3:
  text "3" at 12.45,1.9 h0.8 r90
  text "Layer 3" at -17.25,-21.75 h0.9
Layer4 Bottom:
  text "SS" at 12.45,5.5 h0.8 r90
  text "4" at 12.45,2.7 h0.8 r90

## Silkscreen, mask and mechanical layers (free items; w line width, h text height)
Top Solder:
  lines w0.25: 10,38.5 11,38.5 ; 10,42.5 11,42.5 ; 10.5,38.5 10.5,39.5 ; 10.5,42 10.5,43
  text "1" at 7.75,45.5 h0.8
  text "J2" at 10,44.75 h0.8
  text "J4" at 5.75,26.25 h0.8
  text "ON" at 7.25,24.25 h0.8
  text "CSI2-WAND_Rev01" at 8.5,0.75 h1 r75
Mechanical 1:
  the board outline again, w0.025
Drill Drawing:
  lines w0.024: -22.5,11.5 -22.5,28.5 ; 0,10.25 0,29.75
  lines w0.1: -100.95,-8.575 -32.669,-8.575 ; -100.95,4.55 -32.669,4.55 ; -99.25,52.25 -61.5,52.25 ; -99.25,53.75 -61.5,53.75 ; -99.25,55.25 -61.5,55.25 ; -99.25,56.75 -61.5,56.75 ; -99.25,58.25 -61.5,58.25 ; -99.25,59.75 -61.5,59.75 ; -99.25,61.25 -61.5,61.25 ; -99.25,62.75 -61.5,62.75 ; -94.144,-10.45 -94.144,6.425 ; -85.501,-10.45 -85.501,6.425 ; -84.25,48.75 -84.25,50.25 ; -84.25,50.75 -84.25,64.25 ; -77.25,48.75 -77.25,50.25 ; -77.25,50.75 -77.25,64.25 ; -68.761,-10.45 -68.761,6.425 ; -62.518,-10.45 -62.518,6.425 ; -53.425,-10.45 -53.425,6.425 ; -22.5,57 -22.5,57.25 -27.5,57.25 -27.5,57 13,57 13,58 0,58 0,57 ; -17.75,30.25 -16.25,28.75 ; -100.95,-10.45 -32.669,-10.45 -32.669,6.425 -100.95,6.425 -100.95,-10.45 ; -100.21,-8.012 -99.794,-7.804 -99.377,-8.012 -99.585,-7.596 -99.377,-7.179 -99.794,-7.387 -100.21,-7.179 -100.002,-7.596 -100.21,-8.012 ; -100.21,-6.137 -99.377,-6.137 -99.377,-5.304 -100.21,-5.304 -100.21,-6.137 ; -100.21,-4.262 -99.794,-4.054 -99.377,-4.262 -99.585,-3.846 -99.377,-3.429 -99.794,-3.637 -100.21,-3.429 -100.002,-3.846 -100.21,-4.262 ; -100.21,-2.179 -100.002,-2.179 -99.794,-2.387 -99.585,-2.179 -99.377,-2.179 -99.585,-1.971 -99.377,-1.762 -99.585,-1.762 -99.794,-1.554 -100.002,-1.762 -100.21,-1.762 -100.002,-1.971 -100.21,-2.179 ; -100.21,0.321 -99.377,0.321 -99.794,-0.512 -100.21,0.321 ; -100.21,1.571 -100.002,1.571 -99.794,1.363 -99.585,1.571 -99.377,1.571 -99.585,1.779 -99.377,1.988 -99.585,1.988 -99.794,2.196 -100.002,1.988 -100.21,1.988 -100.002,1.779 -100.21,1.571 ; -100.21,3.446 -100.002,3.446 -100.002,3.238 -99.585,3.238 -99.585,3.446 -99.377,3.446 -99.377,3.863 -99.585,3.863 -99.585,4.071 -100.002,4.071 -100.002,3.863 -100.21,3.863 -100.21,3.446 ; -100.044,-4.096 -99.794,-3.971 -99.544,-4.096 -99.669,-3.846 -99.544,-3.596 -99.794,-3.721 -100.044,-3.596 -99.919,-3.846 -100.044,-4.096 ; -100.044,-2.096 -99.919,-2.096 -99.794,-2.221 -99.669,-2.096 -99.544,-2.096 -99.669,-1.971 -99.544,-1.846 -99.669,-1.846 -99.794,-1.721 -99.919,-1.846 -100.044,-1.846 -99.919,-1.971 -100.044,-2.096 ; -99.25,48.75 -61.5,48.75 -61.5,50.25 -99.25,50.25 -99.25,48.75 ; -99.25,50.75 -99.25,64.25 -61.5,64.25 -61.5,50.75 -99.25,50.75 ; -99.25,64.75 -99.25,66.25 -61.5,66.25 -61.5,64.75 -99.25,64.75
  text "Layer Stackup 4  2F-2RI" at -98.25,65.25 h0.8
  text "Top Soldermask" at -98.25,63.25 h0.8
  text "25 um" at -81.75,63.25 h0.8
  text "standard" at -76.25,63.25 h0.8
  text "Layer1 Top" at -98,61.75 h0.8
  text "35 um" at -81.75,61.75 h0.8
  text "Signal / Zdiff 100R" at -76.25,61.75 h0.8
  text "L 125um / S 125um / L 125um" at -60,61.75 h0.8
  text "Flex" at -13.75,60.5 h1
  text "Polymide" at -98,60.25 h0.8
  text "100 um" at -82.5,60.25 h0.8
  text "Layer2" at -98,58.75 h0.8
  text "35 um" at -81.75,58.75 h0.8
  text "Plane / Ref." at -76.25,58.75 h0.8
  text "Core / Prepreg" at -98,57.25 h0.8
  text "600 um" at -82.5,57.25 h0.8
  text "1.0mm" at 14.25,57 h1
  text "0.3mm" at -33,56.75 h1
  text "Layer3" at -98,55.75 h0.8
  text "35 um" at -81.75,55.75 h0.8
  text "Plane" at -76.25,55.75 h0.8
  text "+/-0.03mm" at -36,55 h1
  text "Prepreg" at -98,54.25 h0.8
  text "100 um" at -82.5,54.25 h0.8
  text "Layer4 Bottom" at -98,52.75 h0.8
  text "35 um" at -81.75,52.75 h0.8
  text "Plane" at -76.25,52.75 h0.8
  text "Bottom Soldermask" at -98,51.25 h0.8
  text "25 um" at -81.75,51.25 h0.8
  text "standard" at -76.25,51.25 h0.8
  text "Thickness approx." at -98.25,49.25 h0.8
  text "1000 um" at -83.25,49.25 h0.8
  text "LASERCUT" at -21.5,30.75 h1
  text "Symbol" at -99.825,5.113 h0.9
  text "Hit Count" at -93.582,5.113 h0.9
  text "Finished Hole Size" at -84.939,5.113 h0.9
  text "Plated" at -68.199,5.113 h0.9
  text "Hole Type" at -61.955,5.113 h0.9
  text "Drill Layer Pair" at -52.863,5.113 h0.9
  text "39" at -93.582,3.238 h0.75
  text "0,200mm (7,87mil)" at -84.939,3.238 h0.75
  text "PTH" at -68.199,3.238 h0.75
  text "Round" at -61.955,3.238 h0.75
  text "Layer1 Top - Layer4 Bottom" at -52.863,3.238 h0.75
  text "8" at -93.582,1.363 h0.75
  text "0,400mm (15,75mil)" at -84.939,1.363 h0.75
  text "NPTH" at -68.199,1.363 h0.75
  text "Round" at -61.955,1.363 h0.75
  text "Layer1 Top - Layer4 Bottom" at -52.863,1.363 h0.75
  text "1" at -93.582,-0.512 h0.75
  text "0,650mm (25,59mil)" at -84.939,-0.512 h0.75
  text "PTH" at -68.199,-0.512 h0.75
  text "Round" at -61.955,-0.512 h0.75
  text "Layer1 Top - Layer4 Bottom" at -52.863,-0.512 h0.75
  text "8" at -93.582,-2.387 h0.75
  text "0,800mm (31,50mil)" at -84.939,-2.387 h0.75
  text "NPTH" at -68.199,-2.387 h0.75
  text "Round" at -61.955,-2.387 h0.75
  text "Layer1 Top - Layer4 Bottom" at -52.863,-2.387 h0.75
  text "3" at -93.582,-4.262 h0.75
  text "1,000mm (39,37mil)" at -84.939,-4.262 h0.75
  text "PTH" at -68.199,-4.262 h0.75
  text "Round" at -61.955,-4.262 h0.75
  text "Layer1 Top - Layer4 Bottom" at -52.863,-4.262 h0.75
  text "4" at -93.582,-6.137 h0.75
  text "1,200mm (47,24mil)" at -84.939,-6.137 h0.75
  text "PTH" at -68.199,-6.137 h0.75
  text "Round" at -61.955,-6.137 h0.75
  text "Layer1 Top - Layer4 Bottom" at -52.863,-6.137 h0.75
  text "2" at -93.582,-8.012 h0.75
  text "3,200mm (125,98mil)" at -84.939,-8.012 h0.75
  text "PTH" at -68.199,-8.012 h0.75
  text "Round" at -61.955,-8.012 h0.75
  text "Layer1 Top - Layer4 Bottom" at -52.863,-8.012 h0.75
  text "65 Total" at -93.582,-9.887 h0.75

## Dimensions
-27.5,28.5 to 13,52 on Drill Drawing
-27.5,57.25 to -22.5,57.25 on Drill Drawing
-22.5,57.5 to 0,58 on Drill Drawing
0,58 to 13,58 on Drill Drawing
13,52 to 13,0 on Drill Drawing

## Text inside footprints (layer, text, board x,y; h text height)
J1: Top Overlay "1" at -23,28 h0.5 r90; Top Overlay "33" at -23,12 h0.5 r90
J2: Top Overlay "1" at 8.5,43.75 h0.7
J3: Top Overlay "1" at 2.25,10 h0.5; Top Overlay "3" at 8,10 h0.5
J4: Top Overlay "22" at 5,25 h0.5 r90; Top Overlay "1" at 5,14.5 h0.5 r90
T1: Drill Drawing "All drills (PTH and NPTH) should run in one work process" at -101.25,-26.75 h0.8; Mechanical 16 "Project:" at -49.25,-19.75 h0.89; Mechanical 16 "Layer Name:" at -17.25,-19.75 h0.89; Mechanical 16 "Germany" at -2,-15.5 h0.89; Mechanical 16 "Stadtroda" at -14.5,-17.25 h0.89; Mechanical 16 "Taschenweg 2a" at -14.75,-15.5 h0.89; Mechanical 16 "Allied Vision" at -24,-15.5 h0.89; Mechanical 16 "Date:" at -49.25,-24.25 h0.89; Mechanical 16 "Title:" at -49.25,-15.25 h0.89; Mechanical 16 "PCB Designer:" at -33.25,-19.75 h0.89; Mechanical 16 "File Name:" at -33.25,-24.25 h0.89; Mechanical 16 "Technologies" at -24,-17 h0.89; Mechanical 16 "Bare Board Number:" at 5.75,-19.75 h0.89; Mechanical 16 "Bare Board Revision:" at 5.75,-15.25 h0.89; Mechanical 16 "2" at -75,-28.25 h0.5; Mechanical 16 "3" at -55,-28.25 h0.5; Mechanical 16 "4" at -35,-28.25 h0.5; Mechanical 16 "5" at -15,-28.25 h0.5; Mechanical 16 "6" at 5,-28.25 h0.5; Mechanical 16 "7" at 25,-28.25 h0.5; Mechanical 16 "1" at -95,-28.25 h0.5; Mechanical 16 "1" at -95,70.75 h0.5; Mechanical 16 "7" at 25,70.75 h0.5; Mechanical 16 "6" at 5,70.75 h0.5; Mechanical 16 "5" at -15,70.75 h0.5; Mechanical 16 "4" at -35,70.75 h0.5; Mechanical 16 "3" at -55,70.75 h0.5; Mechanical 16 "2" at -75,70.75 h0.5; Mechanical 16 "A" at -104.367,61.2 h0.5; Mechanical 16 "B" at -104.367,41.2 h0.5; Mechanical 16 "C" at -104.367,21.2 h0.5; Mechanical 16 "D" at -104.367,1.2 h0.5; Mechanical 16 "E" at -104.367,-18.8 h0.5; Mechanical 16 "E" at 34.633,-18.8 h0.5; Mechanical 16 "D" at 34.633,1.2 h0.5; Mechanical 16 "C" at 34.633,21.2 h0.5; Mechanical 16 "B" at 34.633,41.2 h0.5; Mechanical 16 "A" at 34.633,61.2 h0.5
T2: Mechanical 15 "Bare Board Revision:" at -21.75,-15.25 h0.89; Mechanical 15 "Bare Board Number:" at -21.75,-19.75 h0.89; Mechanical 15 "Technologies" at 8,-17 h0.89; Mechanical 15 "File Name:" at 17.25,-24.25 h0.89; Mechanical 15 "PCB Designer:" at 17.25,-19.75 h0.89; Mechanical 15 "Title:" at 33.25,-15.25 h0.89; Mechanical 15 "Date:" at 33.25,-24.25 h0.89; Mechanical 15 "Allied Vision" at 8,-15.5 h0.89; Mechanical 15 "Taschenweg 2a" at -1.25,-15.5 h0.89; Mechanical 15 "Stadtroda" at -1.5,-17.25 h0.89; Mechanical 15 "Germany" at -14,-15.5 h0.89; Mechanical 15 "Layer Name:" at 1.25,-19.75 h0.89; Mechanical 15 "A" at -104.133,61.2 h0.5; Mechanical 15 "B" at -104.133,41.2 h0.5; Mechanical 15 "C" at -104.133,21.2 h0.5; Mechanical 15 "D" at -104.133,1.2 h0.5; Mechanical 15 "E" at -104.133,-18.8 h0.5; Mechanical 15 "E" at 34.867,-18.8 h0.5; Mechanical 15 "D" at 34.867,1.2 h0.5; Mechanical 15 "C" at 34.867,21.2 h0.5; Mechanical 15 "B" at 34.867,41.2 h0.5; Mechanical 15 "A" at 34.867,61.2 h0.5; Mechanical 15 "2" at 5.5,70.75 h0.5; Mechanical 15 "3" at -14.5,70.75 h0.5; Mechanical 15 "4" at -34.5,70.75 h0.5; Mechanical 15 "5" at -54.5,70.75 h0.5; Mechanical 15 "6" at -74.5,70.75 h0.5; Mechanical 15 "7" at -94.5,70.75 h0.5; Mechanical 15 "1" at 25.5,70.75 h0.5; Mechanical 15 "1" at 25.5,-28.25 h0.5; Mechanical 15 "7" at -94.5,-28.25 h0.5; Mechanical 15 "6" at -74.5,-28.25 h0.5; Mechanical 15 "5" at -54.5,-28.25 h0.5; Mechanical 15 "4" at -34.5,-28.25 h0.5; Mechanical 15 "3" at -14.5,-28.25 h0.5; Mechanical 15 "2" at 5.5,-28.25 h0.5; Mechanical 15 "Project:" at 33.25,-19.75 h0.89